# EAGLE board BreakoutBoard_2 (EAGLE 9.6.2)
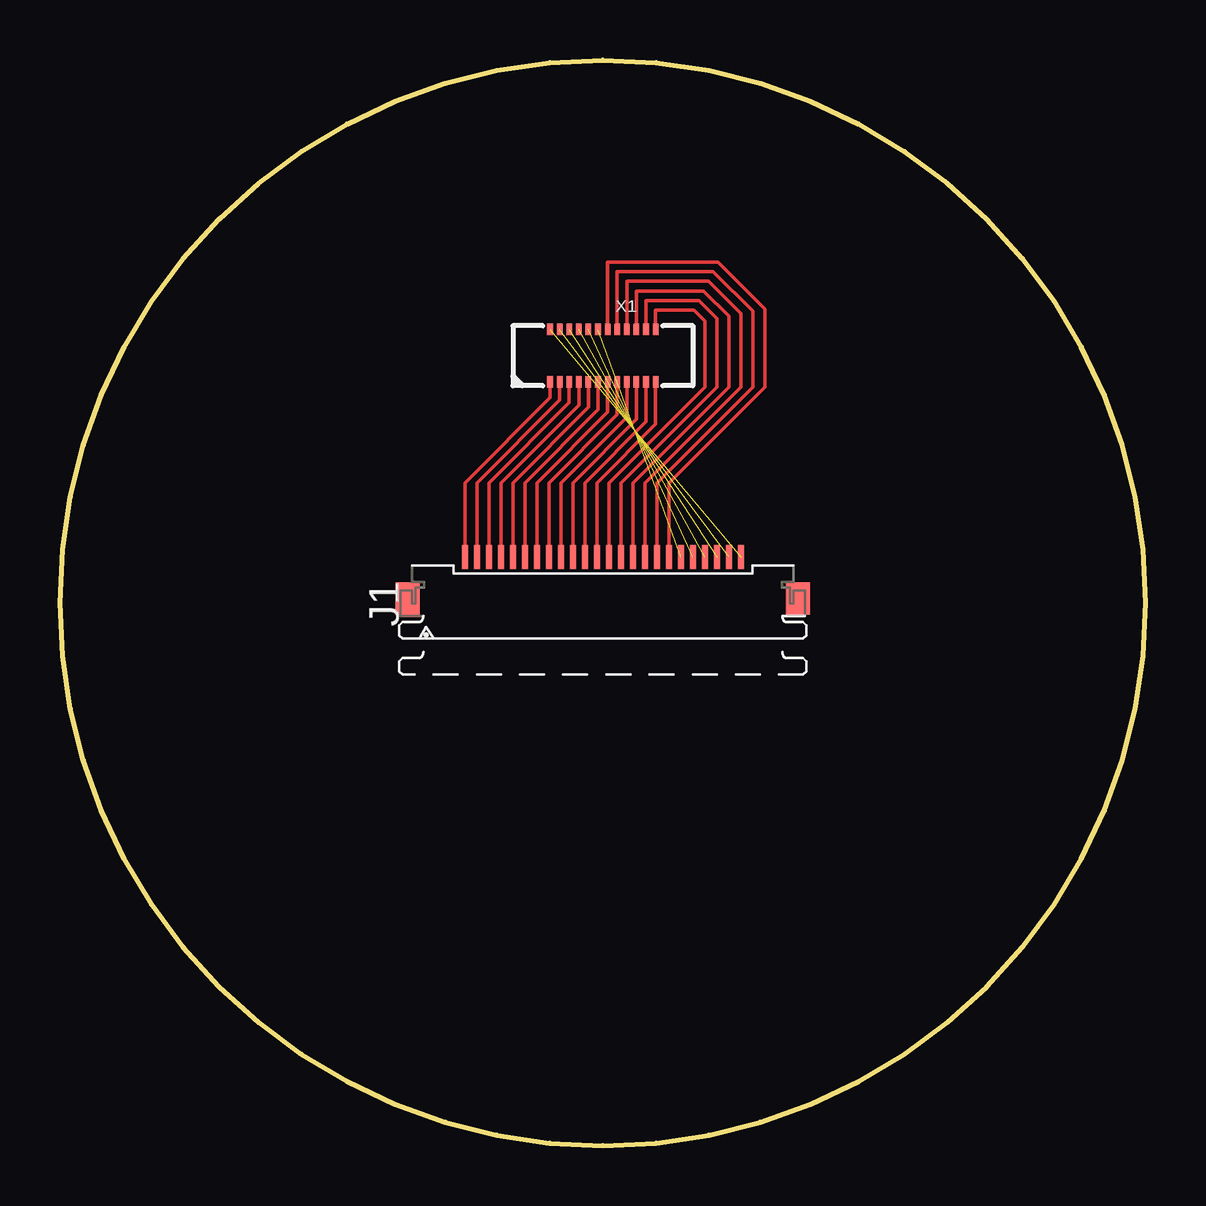
[diagram p0: board, top side]

Size 45.25 x 45.25 mm. Coordinates in mm from the lower left corner, seen from the top.
Outline: 6.63,6.63 arc180 38.63,38.63 arc180 6.63,6.63
Copper layers (1*16): Top 0.035mm / dielectric 1.5mm / Bottom 0.035mm
Design rules "default": minimum track width 6mil, minimum drill 0.35mm, track to track 6mil, track to pad 6mil, pad to pad 6mil, via to via 6mil, smd to smd 6mil, copper to edge 40mil, drill to drill 6mil, minimum pad ring 10mil, minimum via ring 8mil, stop-mask expansion 4mil, vias tented up to drill 0mil, thermal gap 10mil

## Footprints (pad centres in the part's own frame; a part is rotated, then mirrored left to right if it is on the bottom)
XF2L-2435-1 = smd 1 x 0.25: 1 1.905,5.75; 2 1.905,5.25; 3 1.905,4.75; 4 1.905,4.25; 5 1.905,3.75; 6 1.905,3.25; 7 1.905,2.75; 8 1.905,2.25; 9 1.905,1.75; 10 1.905,1.25; 11 1.905,0.75; 12 1.905,0.25; 13 1.905,-0.25; 14 1.905,-0.75; 15 1.905,-1.25; 16 1.905,-1.75; 17 1.905,-2.25; 18 1.905,-2.75; 19 1.905,-3.25; 20 1.905,-3.75; 21 1.905,-4.25; 22 1.905,-4.75; 23 1.905,-5.25; 24 1.905,-5.75 | smd 1.34 x 1: M1 0.18,8.137; M2 0.18,-8.137
OK-24F024-04 = smd 0.47 x 0.23: 1 -1.095,2.2; 2 -1.095,1.8; 3 -1.095,1.4; 4 -1.095,1; 5 -1.095,0.6; 6 -1.095,0.2; 7 -1.095,-0.2; 8 -1.095,-0.6; 9 -1.095,-1; 10 -1.095,-1.4; 11 -1.095,-1.8; 12 -1.095,-2.2; 13 1.095,-2.2; 14 1.095,-1.8; 15 1.095,-1.4; 16 1.095,-1; 17 1.095,-0.6; 18 1.095,-0.2; 19 1.095,0.2; 20 1.095,0.6; 21 1.095,1; 22 1.095,1.4; 23 1.095,1.8; 24 1.095,2.2

## Placement (x,y rotation side)
J1  XF2L-2435-1  [XF2L-2435-1]  22.63,22.63 90 top
X1  LCD  [OK-24F024-04]  22.63,32.93 90 top

## Library data of the parts
J1 = con-omron; MPN: XF2L-2435-1A; OC_FARNELL: unknown; OC_NEWARK: 05M2005
X1 = ER-CON0.4-24P

## Nets
N$1: J1.1 X1.1
N$2: J1.2 X1.2
N$3: J1.3 X1.3
N$4: J1.4 X1.4
N$5: J1.5 X1.5
N$6: J1.6 X1.6
N$7: J1.7 X1.7
N$8: J1.8 X1.8
N$9: J1.9 X1.9
N$10: J1.10 X1.10
N$11: J1.11 X1.11
N$12: J1.12 X1.12
N$13: J1.13 X1.13
N$14: J1.14 X1.14
N$15: J1.15 X1.15
N$16: J1.16 X1.16
N$17: J1.17 X1.17
N$18: J1.18 X1.18
N$19: J1.19 X1.19
N$20: J1.20 X1.20
N$21: J1.21 X1.21
N$22: J1.22 X1.22
N$23: J1.23 X1.23
N$24: J1.24 X1.24

## Tracks (layer width: path | path; a pad name or v marks a point on that pad's centre or on a via)
N$1
  Top 0.152: X1.1 20.43,31.18 16.88,27.63 J1.1
N$2
  Top 0.152: X1.2 20.83,31.08 17.38,27.63 J1.2
N$3
  Top 0.152: X1.3 21.23,30.98 17.88,27.63 J1.3
N$4
  Top 0.152: X1.4 21.63,30.88 18.38,27.63 J1.4
N$5
  Top 0.152: X1.5 22.03,30.78 18.88,27.63 J1.5
N$6
  Top 0.152: X1.6 22.43,30.68 19.38,27.63 J1.6
N$7
  Top 0.152: X1.7 22.83,30.58 19.88,27.63 J1.7
N$8
  Top 0.152: X1.8 23.23,30.48 20.38,27.63 J1.8
N$9
  Top 0.152: X1.9 23.63,30.38 20.88,27.63 J1.9
N$10
  Top 0.152: X1.10 24.03,30.28 21.38,27.63 J1.10
N$11
  Top 0.152: X1.11 24.43,30.18 21.88,27.63 J1.11
N$12
  Top 0.152: X1.12 24.83,30.08 22.38,27.63 J1.12
N$13
  Top 0.152: J1.13 22.88,27.63 26.88,31.63 26.88,34.38 26.43,34.83 24.83,34.83 X1.13
N$14
  Top 0.152: J1.14 23.38,27.63 27.38,31.63 27.38,34.48 26.63,35.23 24.43,35.23 X1.14
N$15
  Top 0.152: J1.15 23.88,27.63 27.88,31.63 27.88,34.58 26.83,35.63 24.03,35.63 X1.15
N$16
  Top 0.152: J1.16 24.38,27.63 28.38,31.63 28.38,34.68 27.03,36.03 23.63,36.03 X1.16
N$17
  Top 0.152: J1.17 24.88,27.63 28.88,31.63 28.88,34.78 27.23,36.43 23.23,36.43 X1.17
N$18
  Top 0.152: J1.18 25.38,27.63 29.38,31.63 29.38,34.88 27.43,36.83 22.83,36.83 X1.18
N$19  (1 unrouted)
N$20  (1 unrouted)
N$21  (1 unrouted)
N$22  (1 unrouted)
N$23  (1 unrouted)
N$24  (1 unrouted)